# Altium PCB FAN_Boardv1_040116.PcbDoc
Units mil, origin at the board's own origin, x right, y up, seen from the top; angles counter-clockwise.
Board outline 3937.01 x 3937.01 mil, 2 copper layers (Top Layer, Bottom Layer); 104 components, 74 nets, 443 pads, 90 vias.
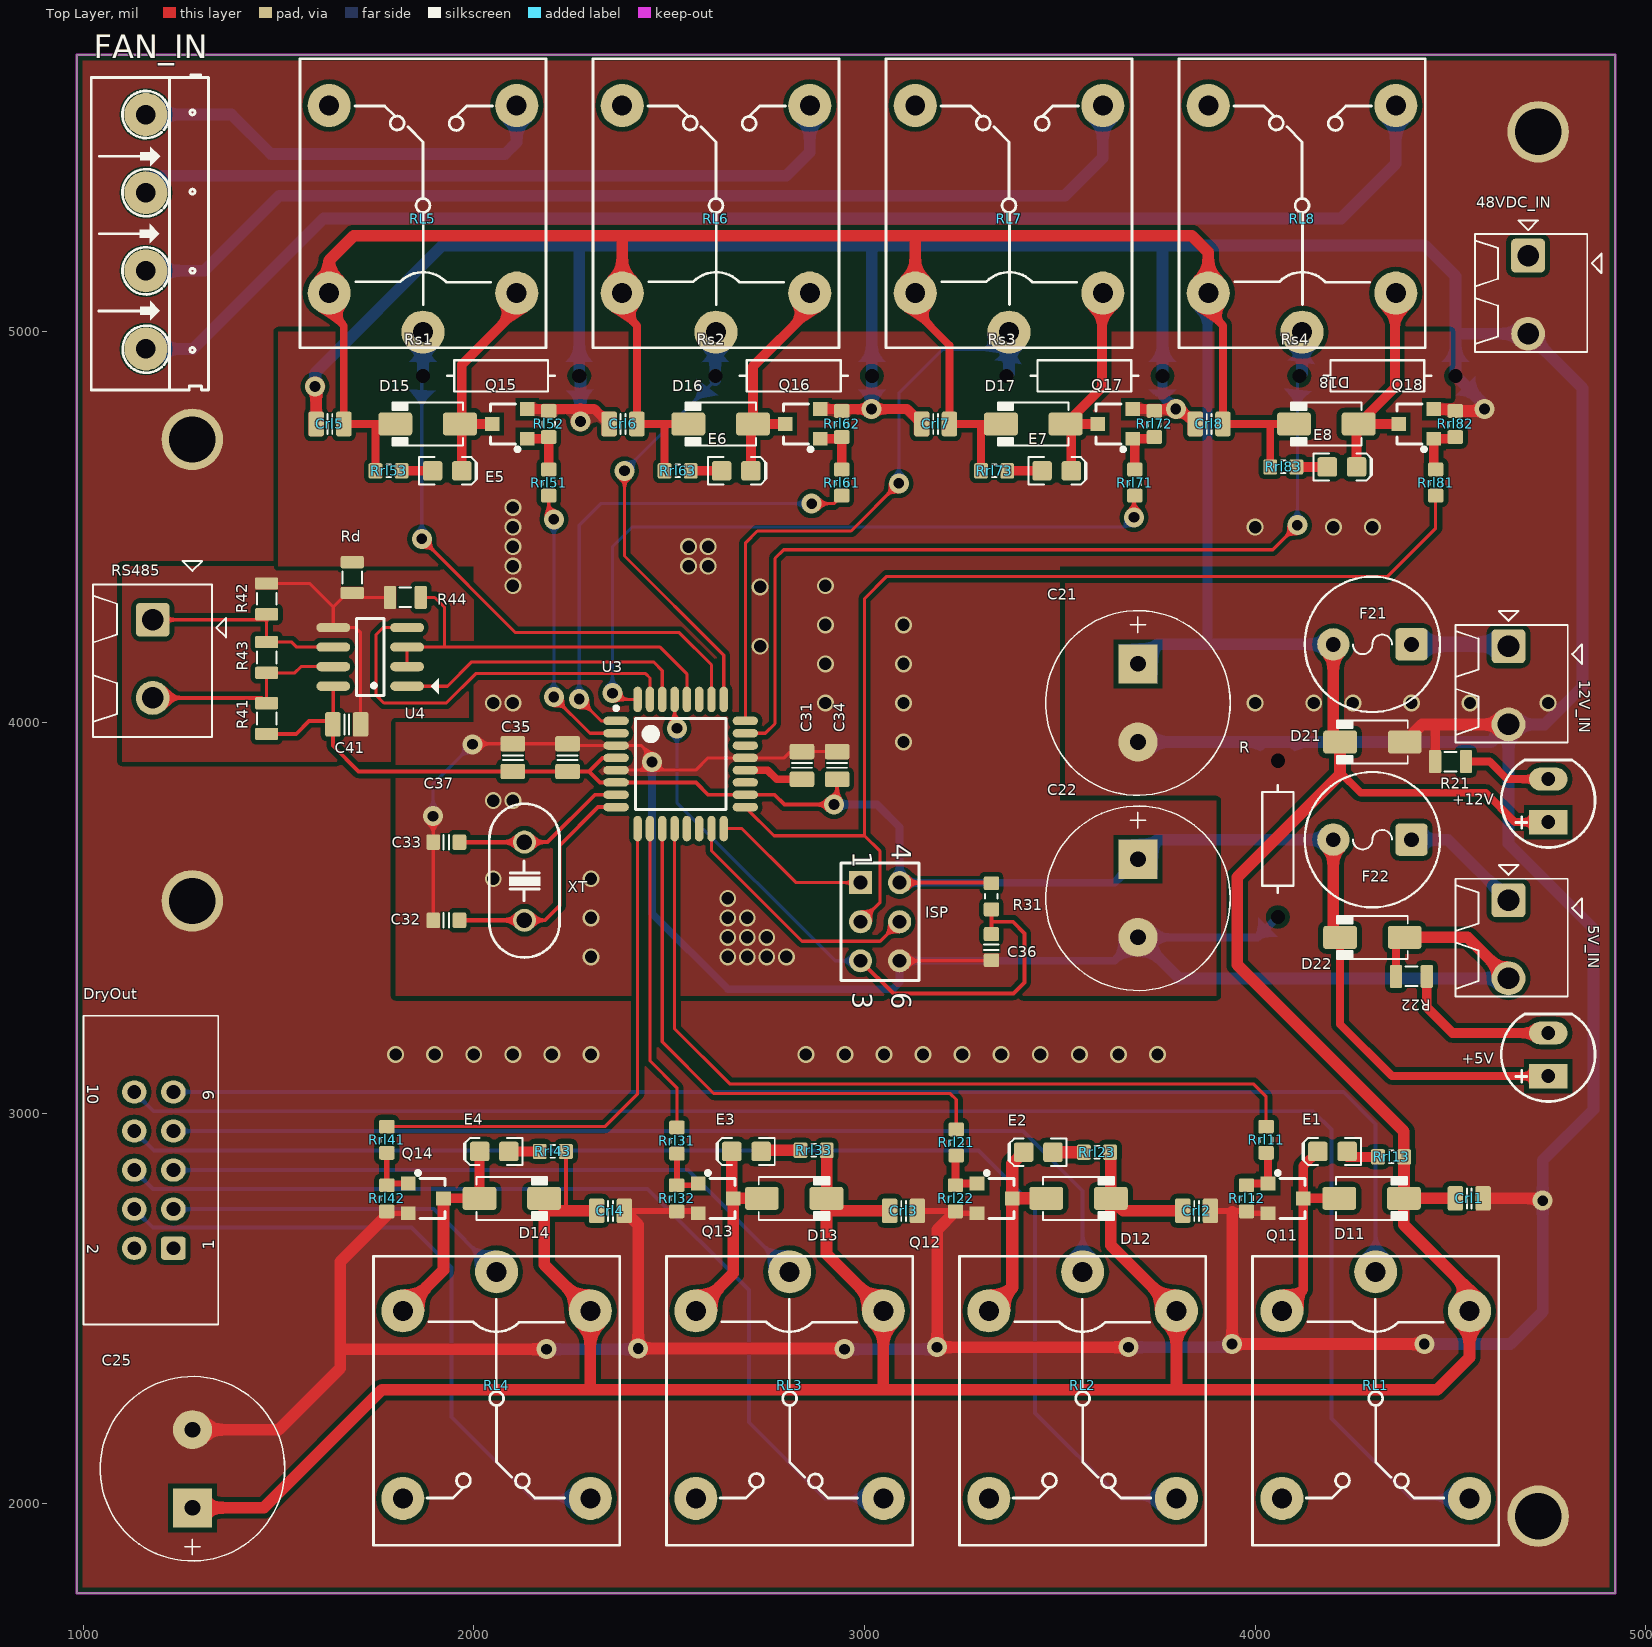
[diagram p0: Top Layer view]
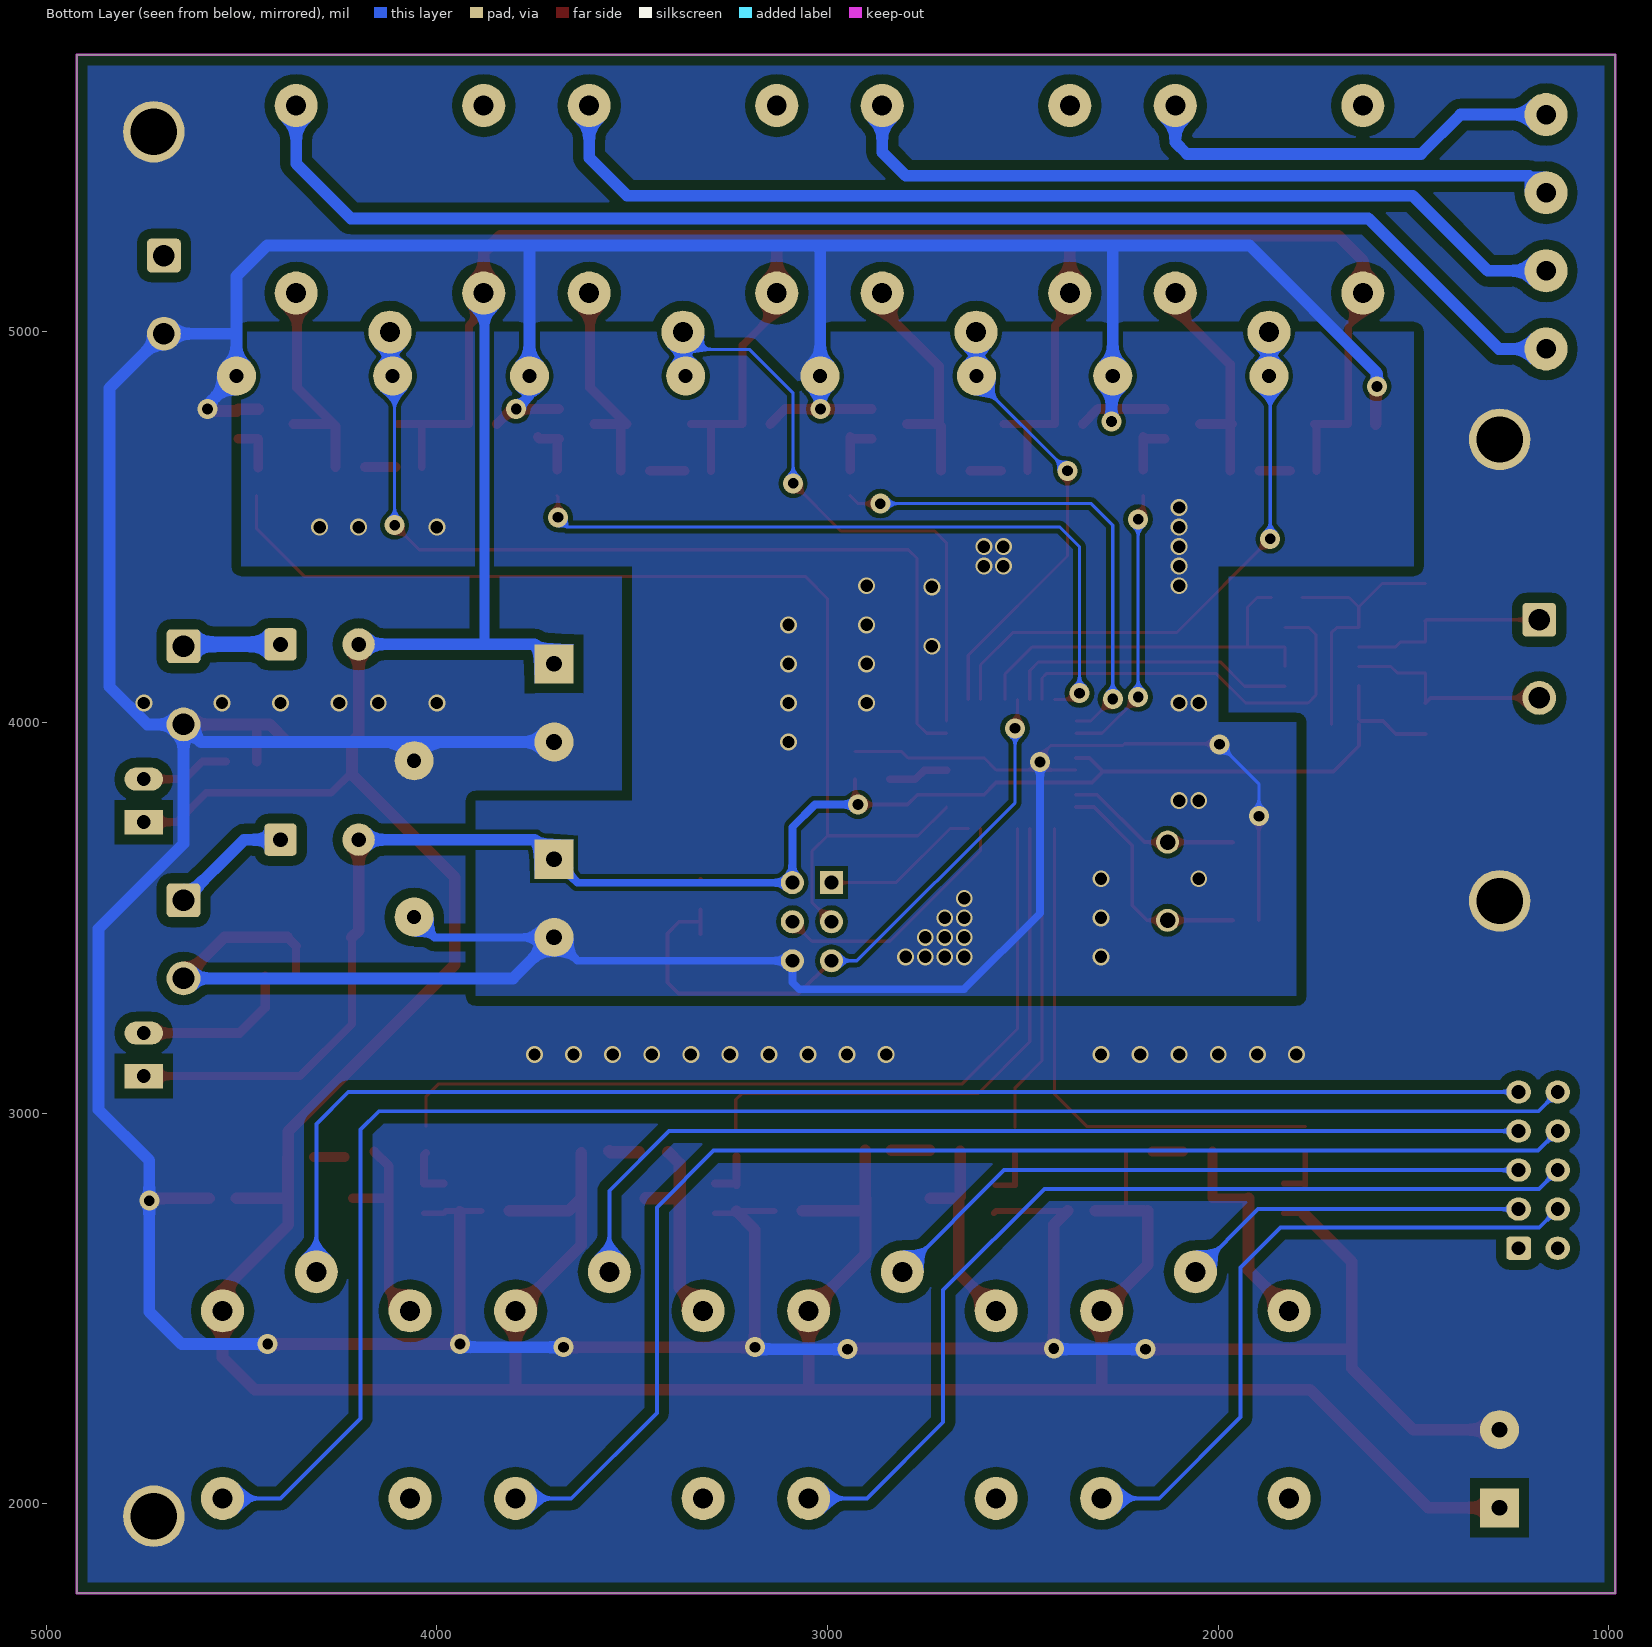
[diagram p1: Bottom Layer view, seen from below]
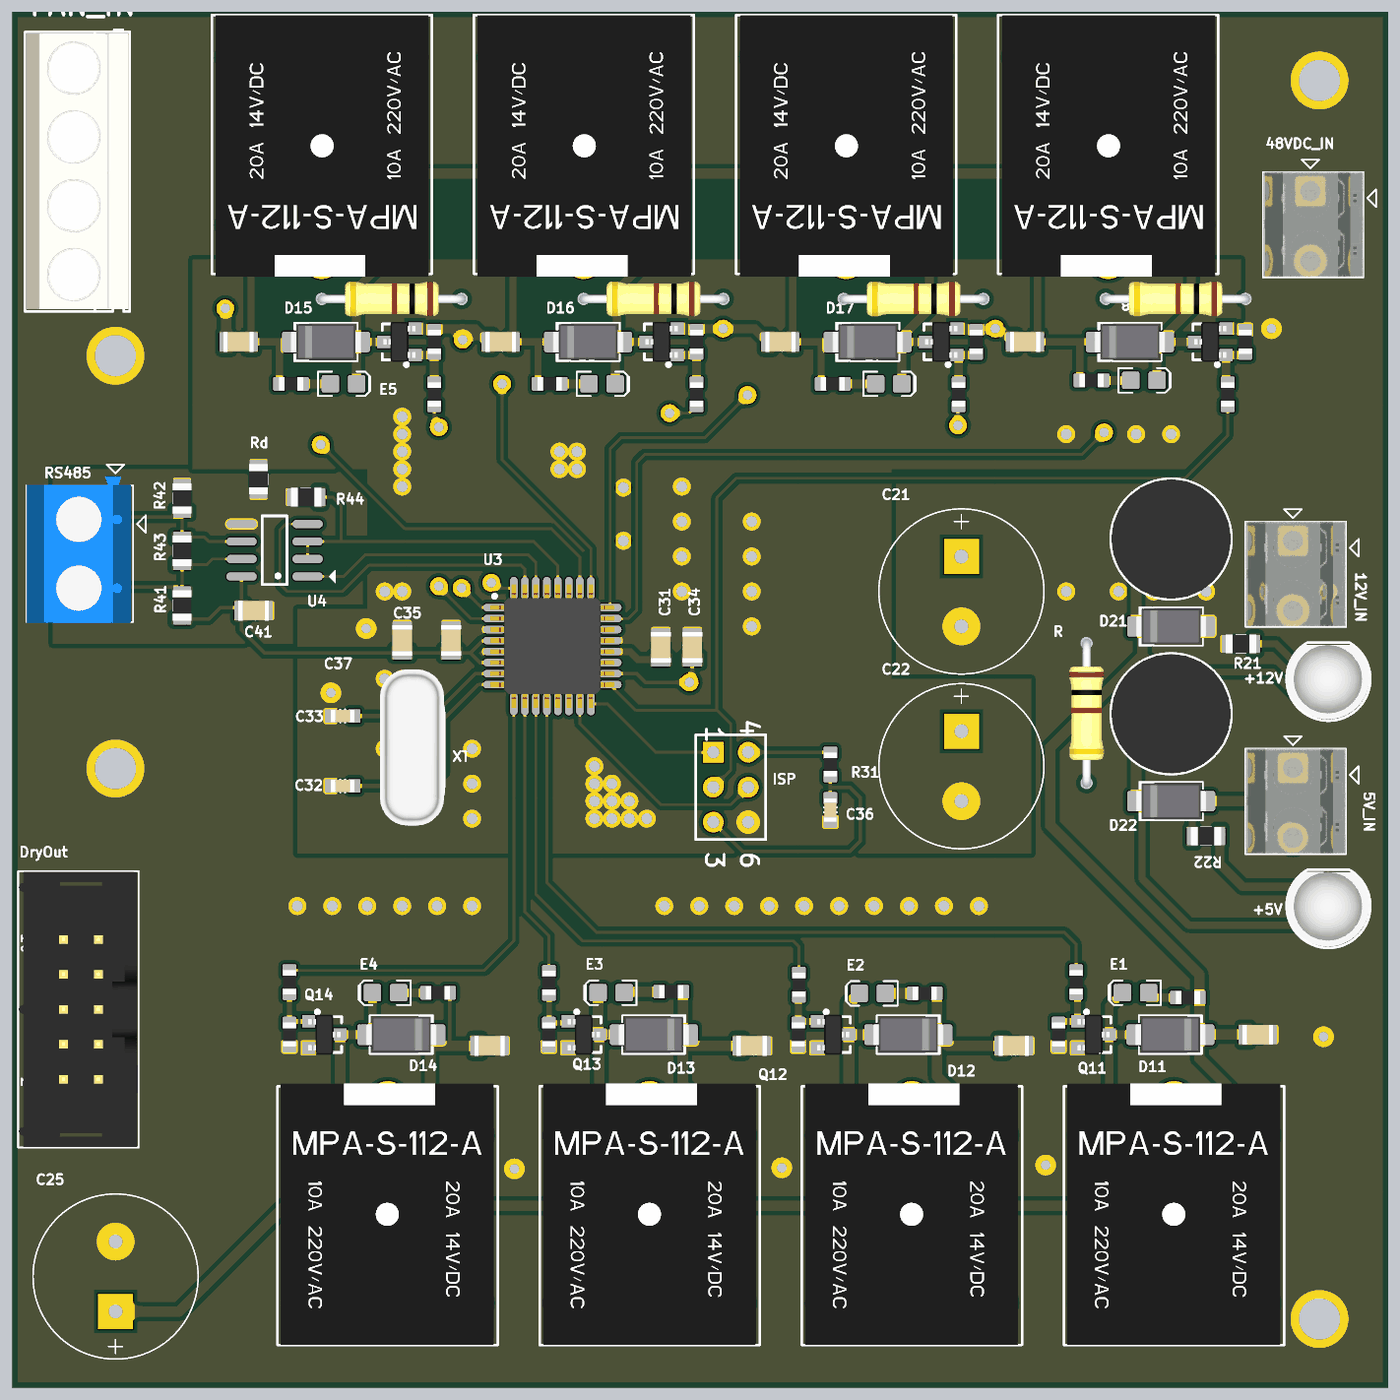
[diagram p2: 3D render of the assembled board from above, using the file's embedded part models]

## Layer stack, top to bottom
Top Solder: solder mask 0.4, Solder Resist, Dk 3.5
Top Layer: signal copper 1.4
Dielectric 1: dielectric 12.6, FR-4, Dk 4.8
Bottom Layer: signal copper 1.4
Bottom Solder: solder mask 0.4, Solder Resist, Dk 3.5

## Board outline
984.25,1771.65 4921.26,1771.65 4921.26,5708.66 984.25,5708.66

## Design rules (kind name [scope] priority, off if disabled: settings)
Clearance [All] p1: gap=12
PlaneConnect [All] p1: planeconnectstyle=Direct reliefexpansion=20 reliefentries=4 reliefconductorwidth=25 reliefairgap=10
PolygonConnect [All] p1: connectstyle=Direct reliefconductorwidth=25 reliefentries=4 polygonreliefangle="90 Angle" airgapwidth=10
RoutingVias [All] p1: holewidth=28 width=50 viastyle="Through Hole" minholewidth=23.62 minwidth=47.24 maxholewidth=196.85 maxwidth=196.85
SolderMaskExpansion [All] p1: expansion=4
Width [All] p1: maxlimit=118.11 minlimit=8 preferedwidth=10
29 further rules are at their usual default settings.

## Classes and differential pairs
component class FAN_Board_Control_v1_040116: 5V_IN 12V_IN 48VDC_IN +5V +12V C21 C22 C31 C32 C33 C34 C35 C36 C37 C41 D21 D22 F21 F22 ISP R R21 R22 R31 R41 R42 R43 R44 Rd RS485 U3 U4 XT
component class FAN_Boardv1_RelayAlarm_040116: C25 Crl1 Crl2 Crl3 Crl4 Crl5 Crl6 Crl7 Crl8 D11 D12 D13 D14 D15 D16 D17 D18 DryOut E1 E2 E3 E4 E5 E6 E7 E8 FAN_IN Q11 Q12 Q13 Q14 Q15 Q16 Q17 Q18 RL1 RL2 RL3 RL4 RL5 RL6 RL7 RL8 Rl52 Rrl11 Rrl12 Rrl13 Rrl21 Rrl22 Rrl23 Rrl31 Rrl32 Rrl33 Rrl41 Rrl42 Rrl43 Rrl51 Rrl53 Rrl61 Rrl62 Rrl63 Rrl71 Rrl72 Rrl73 Rrl81 Rrl82 Rrl83 Rs1 Rs2 Rs3 Rs4

## Components (designator, comment, footprint, x,y, rotation, side; value= is the part's Value field where it differs from the comment)
5V_IN "Stackable ScrewTerm" 2P_PCB_ScrewTerm_200mil 4800,3600 r180 top
12V_IN "Stackable ScrewTerm" 2P_PCB_ScrewTerm_200mil 4800,4250 r180 top
48VDC_IN "Stackable ScrewTerm" 2P_PCB_ScrewTerm_200mil 4850,5250 r180 top
+5V "Led" "LED 5mm RED" 4750,3150 r90 top
+12V "Led" "LED 5mm RED" 4750,3800 r90 top
C21 "2200uF/35V" CP_1000uF_25V 3700,4050 r270 top
C22 "2200uF/35V" CP_1000uF_25V 3700,3550 r270 top
C25 "2200uF/35V" CP_1000uF_25V 1280,2090 r90 top
C31 "Cap" CAPC2012N_F 2840,3890 r90 top
C32 "CAP NP" CAPC1608N 1929.72,3493.7 r180 top
C33 "CAP NP" CAPC1608N 1929.72,3693.7 r180 top
C34 "Cap" CAPC2012N_F 2930,3890 r90 top
C35 "Cap" CAPC2012N_F 2240,3910 r90 top
C36 "CAP NP" CAPC1608N 3325,3425 r90 top
C37 "Cap" CAPC2012N_F 2100,3910 r90 top
C41 "100nF/104" CAPC2012N_F 1675,3995 r180 top
Crl1 "CAP NP" CAPC2012N_F 4547.95,2782 r0 top
Crl2 "CAP NP" CAPC2012N_F 3850,2750 r0 top
Crl3 "CAP NP" CAPC2012N_F 3100,2750 r0 top
Crl4 "CAP NP" CAPC2012N_F 2350,2750 r0 top
Crl5 "CAP NP" CAPC2012N_F 1632,4764 r180 top
Crl6 "CAP NP" CAPC2012N_F 2382,4764 r180 top
Crl7 "CAP NP" CAPC2012N_F 3182,4764 r180 top
Crl8 "CAP NP" CAPC2012N_F 3882,4764 r180 top
D11 "Diode" DO-214AC 4297.95,2782 r0 top
D12 "Diode" DO-214AC 3547.95,2782 r0 top
D13 "Diode" DO-214AC 2820,2782 r0 top
D14 "Diode" DO-214AC 2097.45,2782 r0 top
D15 "Diode" DO-214AC 1882,4764 r180 top
D16 "Diode" DO-214AC 2632,4764 r180 top
D17 "Diode" DO-214AC 3432,4764 r180 top
D18 "Diode" DO-214AC 4182,4764 r180 top
D21 "Diode" DO-214AC 4300,3950 r180 top
D22 "Diode" DO-214AC 4300,3450 r180 top
DryOut "shrouded box header" 10P_PCB_HEADER_BRD_MNT 1181.1,2854.33 r180 top
E1 "Blue" LED-0805-A 4197.95,2902 r180 top
E2 "Blue" LED-0805-A 3445,2900 r180 top
E3 "Blue" LED-0805-A 2697.95,2902 r180 top
E4 "Blue" LED-0805-A 2052.45,2902 r180 top
E5 "Blue" LED-0805-A 1932,4644 r0 top
E6 "Blue" LED-0805-A 2672,4644 r0 top
E7 "Blue" LED-0805-A 3492,4644 r0 top
E8 "Blue" LED-0805-A 4222,4654 r0 top
F21 "1.5A" FUSE_SR-5-BK 4300,4200 r180 top
F22 "1.5A" FUSE_SR-5-BK 4300,3700 r180 top
FAN_IN "Header 4" HED4 1161,5556 r270 top
ISP "Header 3X2A" HDR2X3_CEN 2990,3590 r270 top
Q11 "C828" "SOT23 TOP" 4077.95,2782 r270 top
Q12 "C828" "SOT23 TOP" 3333.07,2782 r270 top
Q13 "C828" "SOT23 TOP" 2619.45,2782 r270 top
Q14 "C828" "SOT23 TOP" 1877.45,2782 r270 top
Q15 "C828" "SOT23 TOP" 2092,4764 r90 top
Q16 "C828" "SOT23 TOP" 2842,4764 r90 top
Q17 "C828" "SOT23 TOP" 3642,4764 r90 top
Q18 "C828" "SOT23 TOP" 4412,4764 r90 top
R "Res" RESTH_AXIAL-0.4 4058,3702 r270 top
R21 "Res_0805_1k" RESC2012N_F 4500,3900 r180 top
R22 "Res_0805_1k" RESC2012N_F 4400,3350 r180 top
R31 "Res" RESC1608N_ZERO 3325,3555 r90 top
R41 "1k" RESC2012N_F 1470,4010 r270 top
R42 "1k" RESC2012N_F 1470,4316.38 r270 top
R43 "330R" RESC2012N_F 1470,4166.38 r270 top
R44 "330R" RESC2012N_F 1825,4320 r0 top
Rd "Res" RESC2012N_F 1689,4371 r90 top
RL1 "Relay 10A/5V" RL_5PIN 3994.45,2635 r270 top
RL2 "Relay 10A/5V" RL_5PIN 3244.45,2635 r270 top
RL3 "Relay 10A/5V" RL_5PIN 2494.45,2635 r270 top
RL4 "Relay 10A/5V" RL_5PIN 1744.45,2635 r270 top
RL5 "Relay 10A/5V" RL_5PIN 2184,4958 r90 top
RL6 "Relay 10A/5V" RL_5PIN 2934,4958 r90 top
RL7 "Relay 10A/5V" RL_5PIN 3684,4958 r90 top
RL8 "Relay 10A/5V" RL_5PIN 4434,4958 r90 top
Rl52 "Res" RESC1608N_ZERO 2192,4764 r270 top
Rrl11 "Res" RESC1608N_ZERO 4027.95,2932 r270 top
Rrl12 "Res" RESC1608N_ZERO 3977.95,2782 r90 top
Rrl13 "Res" RESC1608N_ZERO 4347.95,2888.11 r0 top
Rrl21 "Res" RESC1608N_ZERO 3235,2925 r270 top
Rrl22 "Res" RESC1608N_ZERO 3233.07,2782 r90 top
Rrl23 "Res" RESC1608N_ZERO 3595,2900 r0 top
Rrl31 "Res" RESC1608N_ZERO 2520,2930 r270 top
Rrl32 "Res" RESC1608N_ZERO 2519.45,2782 r90 top
Rrl33 "Res" RESC1608N_ZERO 2870,2905 r0 top
Rrl41 "Res" RESC1608N_ZERO 1777.45,2932 r270 top
Rrl42 "Res" RESC1608N_ZERO 1777.45,2782 r90 top
Rrl43 "Res" RESC1608N_ZERO 2202.45,2902 r0 top
Rrl51 "Res" RESC1608N_ZERO 2192,4614 r90 top
Rrl53 "Res" RESC1608N_ZERO 1782,4644 r180 top
Rrl61 "Res" RESC1608N_ZERO 2942,4614 r90 top
Rrl62 "Res" RESC1608N_ZERO 2942,4764 r270 top
Rrl63 "Res" RESC1608N_ZERO 2522,4644 r180 top
Rrl71 "Res" RESC1608N_ZERO 3692,4614 r90 top
Rrl72 "Res" RESC1608N_ZERO 3742,4764 r270 top
Rrl73 "Res" RESC1608N_ZERO 3332,4644 r180 top
Rrl81 "Res" RESC1608N_ZERO 4462,4614 r90 top
Rrl82 "Res" RESC1608N_ZERO 4512,4764 r270 top
Rrl83 "Res" RESC1608N_ZERO 4072,4654 r180 top
Rs1 "Res" RESTH_AXIAL-0.4 2070,4887 r180 top
Rs2 "Res" RESTH_AXIAL-0.4 2819,4887 r180 top
Rs3 "Res" RESTH_AXIAL-0.4 3563,4887 r180 top
Rs4 "Res" RESTH_AXIAL-0.4 4313,4887 r180 top
RS485 "Stackable ScrewTerm" 2P_PCB1 1330,4317.87 r180 top
U3 "ATmega88PA" 32PIN 2529.72,3893.7 r0 top
U4 "MAX485" SO-8 1735,4167.87 r180 top
XT "20MHz" XT2 2129.72,3593.7 r270 top

## Footprints (in the part's own frame and the unit in brackets; to place one, negate y for a bottom-side part, rotate by r counter-clockwise, add the part's x,y. Pads: shape width x height; smd on the part's side, far side on the other; paste and mask are expansions set on the pad)
2P_PCB1 [mm]
  rrect25% 2.2x2.2 hole 1.4: 1(3.85,1.397)
  round 2.2 hole 1.4: 2(3.85,6.477)
  silkscreen extent -0.93,-2.41 7.75,9.02, body extent 0.14,-1.54 7.74,9.06, height 10.01
2P_PCB_ScrewTerm_200mil [mm]
  rrect25% 2.2x2.2 hole 1.4: 1(3.85,1.397)
  round 2.2 hole 1.4: 2(3.85,6.477)
  silkscreen extent -0.93,-0.89 7.3,7.66, body extent 0,0 7.3,7.62, height 8.5
10P_PCB_HEADER_BRD_MNT [mm] "HEADER BRD MNT 10POS 2.54MM"
  round 1.016 on Mech14: 0(0,0)
  rrect25% 1.6x1.5 hole 0.9: 1(-1.27,5.08)
  oval 1.6x1.5 hole 0.9: 2(1.27,5.08) 3(-1.27,2.54) 4(1.27,2.54) 5(-1.27,0) 6(1.27,0) 7(-1.27,-2.54) 8(1.27,-2.54) 9(-1.27,-5.08) 10(1.27,-5.08)
  silkscreen extent -4.19,-10.03 4.57,10.03, body extent -4.11,-10.01 4.52,10.01, height 9.91
32PIN [mm]
  oval 1.65x0.55 smd: 1(-4.2,2.8) 2(-4.2,2) 3(-4.2,1.2) 4(-4.2,0.4) 5(-4.2,-0.4) 6(-4.2,-1.2) 7(-4.2,-2) 8(-4.2,-2.8) 17(4.2,-2.8) 18(4.2,-2) 19(4.2,-1.2) 20(4.2,-0.4) 21(4.2,0.4) 22(4.2,1.2) 23(4.2,2) 24(4.2,2.8)
  oval 0.55x1.65 smd: 9(-2.8,-4.2) 10(-2,-4.2) 11(-1.2,-4.2) 12(-0.4,-4.2) 13(0.4,-4.2) 14(1.2,-4.2) 15(2,-4.2) 16(2.8,-4.2) 25(2.8,4.2) 26(2,4.2) 27(1.2,4.2) 28(0.4,4.2) 29(-0.4,4.2) 30(-1.2,4.2) 31(-2,4.2) 32(-2.8,4.2)
  silkscreen extent -4.32,-2.95 2.95,3.75, body extent -4.5,-4.5 4.5,4.5, height 1.6
CAPC1608N [mm] "Chip Capacitor, Body 1.6x0.8mm, 0603, IPC Medium Density"
  round 0.254 on Mech14: 0(0,0)
  rrect25% 0.9x1 smd: 1(-0.85,0) 2(0.85,0)
  Top Layer pour cut-out: -0.4,0.6 0.4,0.6 0.4,-0.6 -0.4,-0.6
  silkscreen extent -0.18,-0.48 0.18,0.48, body extent -0.85,-0.45 0.85,0.45, height 0.89
CAPC2012N_F [mm] "Chip Capacitor, Body 2.0x1.2mm, 0805, IPC Medium Density, for Flex circuits"
  round 0.254 on Mech14: 0(0,0)
  rrect25% 1.2x1.4 on Top Solder: 1(-0.9,0) 1(0.9,0)
  rrect25% 1x1.6 smd paste-1: 1(-0.9,0) 2(0.9,0)
  rrect25% 1x1.4 on Top Paste: 1(-0.9,0) 1(0.9,0)
  Top Layer pour cut-out: -0.4,0.8 0.4,0.8 0.4,-0.8 -0.4,-0.8
  silkscreen extent -0.15,-0.65 0.15,0.65, body extent -1.1,-0.72 1.1,0.73, height 1.34
CP_1000uF_25V [mil]
  rect 100x100 hole 40: 1(-100,0)
  round 100 hole 40: 2(100,0)
  silkscreen extent -236,-236 236,236, body extent -236,-236 237,236, height 791
DO-214AC [mm] "JEDEC DO214 variation AC. SMA"
  round 0.508 on Mech14: 0(0,0)
  rrect25% 2.2x1.5 smd: A(-2.1,0) K(2.1,0)
  silkscreen extent -2.3,-1.4 2.3,1.4, body extent -2.6,-1.3 2.6,1.3, height 2.42
FUSE_SR-5-BK [mm]
  round 0.5 on Mech14: 0(0,0)
  rrect25% 2.1x2.1 hole 0.965: 1(-2.54,0)
  round 2.1 hole 0.965: 2(2.54,0)
  silkscreen extent -4.4,-4.4 4.4,4.4, body extent -4.35,-4.32 4.35,4.32, height 8.29
HDR2X3_CEN [mm] "Connector; Header; 3x2 Position"
  rect 1.5x1.5 hole 0.9: 1(0,0)
  round 1.5 hole 0.9: 2(2.54,0) 3(5.08,0) 4(0,2.54) 5(2.54,2.54) 6(5.08,2.54)
  silkscreen extent -1.27,-1.27 6.35,3.81
HED4 [mil] "Header 4, 4 pin, hight 300mil, Pin to Pin 200, Colour Green"
  round 110 hole 50: 1(0,0) 2(200,0) 3(400,0) 4(600,0)
  silkscreen extent -101,-140 705,160, body extent -90,-138 698,157, height 394
"LED 5mm RED" [mm]
  rect 1.6x2.5 hole 0.9: A(-1.397,0)
  oval 1.5x2.5 hole 0.9: K(1.397,0)
  silkscreen extent -3.04,-3.05 2.64,3.04, body extent -2.94,-2.97 2.48,3.05, height 12.31
LED-0805-A [mil]
  round 20 on Mech14: 0(0,0)
  rrect25% 50x50 smd: A(-37.5,0) K(37.5,0)
  Top Layer pour cut-out: -15,30 15,30 15,-30 -15,-30
  silkscreen extent -72,-35 77,35, body extent -39,-25 39,25, height 31
RESC1608N_ZERO [mm] "Chip Resistor, Body 1.6x0.8mm, 0603, IPC Medium Density"
  round 0.254 on Mech14: 0(0,0)
  rrect25% 0.9x1 smd: 1(-0.85,0) 2(0.85,0)
  Top Layer pour cut-out: -0.4,0.6 0.4,0.6 0.4,-0.6 -0.4,-0.6
  silkscreen extent -0.15,-0.41 0.15,0.41, body extent -0.87,-0.47 0.88,0.48, height 0.54
RESC2012N_F [mm] "Chip Resistor, Body 2.0x1.2mm, 0805, IPC Medium Density"
  round 0.254 on Mech14: 0(0,0)
  rrect25% 1x1.3 on Top Solder: 1(-1,0) 1(1,0)
  rrect25% 0.8x1.5 smd paste-1: 1(-1,0) 2(1,0)
  rrect25% 0.8x1.3 on Top Paste: 1(-1,0) 1(1,0)
  Top Layer pour cut-out: -0.6,0.75 0.6,0.75 0.6,-0.75 -0.6,-0.75
  silkscreen extent -0.38,-0.64 0.38,0.64, body extent -1.1,-0.67 1.1,0.68, height 0.69
RESTH_AXIAL-0.4 [mil]
  round 0 / inner round 0 / far side round 100 hole 36 unplated: 1(-200,0) 2(200,0)
  silkscreen extent -138,-40 138,40, body extent -212,-50 212,50, height 102
RL_5PIN [mm]
  round 2.8 hole 1.3: 1(1.041,7.976) 2(15.773,14.072) 3(15.773,1.88) 4(3.581,1.88) 5(3.581,14.072)
  silkscreen extent 0.03,-0.03 18.82,15.98, body extent -0.18,0.2 18.82,15.7, height 15.5
SO-8 [mm] "8-Pin Small Outline Integrated Circuit 1.27 mm Pitch, IPC Medium Density"
  oval 2.2x0.6 smd: 1(-2.4,1.905) 2(-2.4,0.635) 3(-2.4,-0.635) 4(-2.4,-1.905) 5(2.4,-1.905) 6(2.4,-0.635) 7(2.4,0.635) 8(2.4,1.905)
  silkscreen extent -4.44,-2.5 0.9,2.5, body extent -1.95,-2.45 1.95,2.45, height 1.75
"SOT23 TOP" [mm]
  rect 0.9x0.95 smd: 1(-0.965,-1.143) 2(0,1.143) 3(0.965,-1.143)
  silkscreen extent -1.77,-0.63 1.3,1.25, body extent -1.46,-1.17 1.46,1.17, height 1
XT2 [mm]
  round 1.5 hole 1: 1(-2.54,0) 2(2.54,0)
  silkscreen extent -5.03,-2.29 4.96,2.29, body extent -5.93,-2.36 5.42,2.29, height 3.5

## Part data
5V_IN 12V_IN 48VDC_IN RS485: library part 2P_ScrewTerm_90S_3.81MM, "Terminal Block Screw Type THT 2-Position 3.81mm pitch"
C21 C22 C25: library part CP4, "Cap 1000uF/16V - 220uF/50V"
C41: library part "CAP NP"
DryOut: library part CONN_HEADER_2x5P_0.100in_Male, "Header THD 10 POS Double-row 2.54mm pitch"
E1 E2 E3 E4 E5 E6 E7 E8: library part LED_SMD_Blue_0805_100mcd, "LED 0805 SMD Blue 100mcd 470nm"
F21 F22: library part Fuse
FAN_IN: library part Hed4, "Header 4 (Green)"
ISP: "Header, 3-Pin, Dual row"
Q11 Q12 Q13 Q14 Q15 Q16 Q17 Q18: library part NPN, "Transistor C828 C1815...."
R21 R22: library part Res
R41 R42 R43 R44: library part Res, "Tro dan"
RL1 RL2 RL3 RL4 RL5 RL6 RL7 RL8: library part "Relay 1", "Relay SPDT,10A - 12VDC 5 Pin"
U3: library part ATmega48/168/328, "ATmega48/168/328"
U4: "RS232 - RS485 (Same sn75176)"
XT: library part Crystal

## Free pads (board coordinates)
  round 157.48 hole 118.11: 2(4724.41,5511.81) 3(4724.41,1968.5) 4(1279.53,4724.41) 5(1279.53,3543.31)

## Via types
v1: diameter 43.31, hole 31.5, Top Layer to Bottom Layer, 62 vias
v2: diameter 51.18, hole 27.56, Top Layer to Bottom Layer, 28 vias

## Nets (pads, with @x,y where several pads share a name; then routed paths per layer and width w, separated by ;. In a path a pad name is that pad's centre, name@x,y a point inside that pad or via, vN(x,y) a via of type N, cw(c..) or ccw(c..) an arc to the next point about the centre after c; other vN are vias at no path point)
+12V: +12V.A C21.1 C25.1 Crl1.1@4512.52,2782 Crl2.1@3814.57,2750 Crl3.1@3064.57,2750 Crl4.1@2314.57,2750 Crl5.1@1667.43,4764 Crl6.1@2417.43,4764 Crl7.1@3217.43,4764 Crl8.1@3917.43,4764 D11.K D12.K D13.K D14.K D15.K D16.K D17.K D18.K D21.K F21.2 RL1.5 RL2.5 RL3.5 RL4.5 RL5.5 RL6.5 RL7.5 RL8.5 Rrl13.2 Rrl23.2 Rrl33.2 Rrl43.2 Rrl53.2 Rrl63.2 Rrl73.2 Rrl83.2 | length 15337.3
  Top Layer w10: Rrl43.2 2235.91,2753.09 2239,2750
  Top Layer w20: RL5.5@1628,5055 1667.43,5015.57 1667.43,4764 1755,4764 1748.54,4757.54 Rrl53.2 ; RL6.5@2378,5055 2417.43,5015.57 2417.43,4764 D16.K ; Rrl63.2 2488.54,4757.54 ; RL7.5@3128,5055 3217.43,4965.57 3217.43,4764 3295,4764 ; Rrl73.2 3298.54,4760.46 3295,4764 ; D17.K 3295,4764 ; RL8.5@3878,5055 3917.43,5015.57 3917.43,4764 4035,4764 ; Rrl83.2 4038.54,4760.46 4035,4764 ; D18.K 4035,4764 ; 4217.32,3872.68 4270,3820 4590,3820 4665,3745 +12V.A
  Top Layer w30: C25.1 1463,1990 1765,2292 2305,2292 ; RL5.5 1630,5183 1693,5246 3838,5246 3880,5204 RL8.5 ; 2180.13,2750 2180.13,2612.32 RL4.5 2298.45,2298.55 2305,2292 ; 2190.13,2750 2239,2750 Crl4.1@2314.57,2750 ; RL6.5 2380,5245 ; D13.K 2902.68,2750 ; D13.K@2903.46,2782.79 Rrl33.2 ; Crl3.1@3064.57,2750 2902.68,2750 ; RL7.5 3130,5245 ; Rrl23.2@3630.63,2897.88 D12.K ; Crl2.1@3814.57,2750 3662.63,2750 D12.K ; F21.2 4200,3967.32 D21.K 4217.32,3872.68 4217.32,3867.32 3954,3604 3954,3380 4380.63,2953.37 D11.K ; D11.K@4381.42,2782.79 Rrl13.2 ; Crl1.1@4512.52,2782 D11.K ; 2305,2292 3048,2292 ; 2902.68,2750 2902.68,2639.77 RL3.5 3048.45,2292.45 3048,2292 ; 3048,2292 3800,2292 ; D12.K 3630.63,2661.82 RL2.5 3798.45,2293.55 3800,2292 ; 3800,2292 4466,2292 4548.45,2374.45 RL1.5 4548.45,2546.55 4380.63,2714.37 D11.K
  Bottom Layer w25: RL8.5@3878,5055 3878,4202 3880,4200
  Bottom Layer w30: C21.1 3750,4200 3880,4200 F21.2
+48V: 48VDC_IN.1
ADC0: RL8.1 Rs4.2 U3.23 | length 2378.2
  Top Layer w8: U3.23 2746.44,3972.44 2771,3997 2771,4420 2793,4442 4045,4442 v2(4108,4505)
  Bottom Layer w8: v2(4108,4505) Rs4.2@4108,4887
  Bottom Layer w30: Rs4.2 4120,4894 RL8.1
ADC1: RL7.1 Rs3.2 U3.24 | length 1583.7
  Top Layer w8: U3.24 2695.08,4459.08 2726,4490 2966,4490 v2(3088,4612)
  Bottom Layer w8: v2(3088,4612) 3088,4843 3200,4955 RL7.1@3368,4955
  Bottom Layer w30: Rs3.2 3370,4894 RL7.1
ADC2: RL6.1 Rs2.2 U3.25 | length 1097.2
  Top Layer w8: v2(2386,4644) 2386,4426 2639.96,4172.04 U3.25
  Bottom Layer w8: v2(2386,4644) Rs2.2@2618,4876
  Bottom Layer w30: Rs2.2@2618,4876 RL6.1@2618,4955
ADC3: RL5.1 Rs1.2 U3.26 | length 1492.5
  Top Layer w8: v2(1867,4470) 2107,4230 2526,4230 2608.46,4147.54 U3.26
  Bottom Layer w8: v2(1867,4470) Rs1.2@1867,4887
  Bottom Layer w30: Rs1.2 RL5.1
ADC4: U3.27
ADC6: U3.19
ADC7: U3.22
AREF: C31.1@2840,3854.57 U3.20 | length 154.6
  Top Layer w20: U3.20 2752.05,3877.95 2775.43,3854.57 C31.1@2840,3854.57
COM1: DryOut.9 RL1.1 | length 3489.8
  Bottom Layer w10: DryOut.9 4226.67,3054.33 4308.45,2972.55 RL1.1
COM2: DryOut.7 RL2.1 | length 2598.2
  Bottom Layer w10: DryOut.7 3405.67,2954.33 3558.45,2801.55 RL2.1
COM3: DryOut.5 RL3.1 | length 1685.2
  Bottom Layer w10: DryOut.5 2548.12,2854.33 RL3.1
COM4: DryOut.3 RL4.1 | length 893.8
  Bottom Layer w10: DryOut.3 1898.12,2754.33 RL4.1
COM5: DryOut.1
DGND: C41.1@1710.43,3995 R42.1@1470,4355.75 R44.1@1785.63,4320 Rd.1@1689,4331.63 U4.5 | length 713.4
  Top Layer w8: R42.1@1470,4355.75 1580.28,4355.75 1640.51,4295.51 ; C41.1@1710.43,3995 1710.43,4229.57 1697.13,4242.87 U4.5 1640.51,4295.51 ; R44.1@1785.63,4320 1665,4320 1640.51,4295.51
FAN1: Rrl51.1 U3.2 | length 718.6
  Top Layer w8: Rrl51.1 2192,4533 v2(2205,4520) ; v2(2205,4065) 2297.56,3972.44 U3.2
  Bottom Layer w8: v2(2205,4065) v2(2205,4520)
FAN2: Rrl61.1 U3.1 | length 1265.9
  Top Layer w8: v2(2270,4060) 2326.06,4003.94 U3.1 ; v2(2865,4560) 2921.46,4560 Rrl61.1
  Bottom Layer w8: v2(2270,4060) 2270,4505 2325,4560 v2(2865,4560)
FAN3: Rrl71.1 U3.32 | length 1868.5
  Top Layer w8: v2(2355,4075) 2370.94,4059.06 U3.32 ; v2(3690,4525) 3690,4578.54 Rrl71.1
  Bottom Layer w8: v2(2355,4075) 2355,4450 2405,4500 3665,4500 v2(3690,4525)
FAN4: ISP.2 Rrl81.1 U3.17 | length 2819.7
  Top Layer w8: U3.17 2768.54,3710 3000,3710 ; ISP.2 3040,3540 3040,3670 3000,3710 ; Rrl81.1 4462,4497 4339,4374 3057,4374 3000,4317 3000,3710
FAN_GND_1: FAN_IN.1 RL5.3 | length 1097.3
  Bottom Layer w30: FAN_IN.1 1380,5556 1481,5455 2080,5455 2110,5485 RL5.3
FAN_GND_2: FAN_IN.2 RL6.3 | length 1861.7
  Bottom Layer w30: FAN_IN.2 1204,5399 2800,5399 2860,5459 RL6.3
FAN_GND_3: FAN_IN.3 RL7.3 | length 2702.7
  Bottom Layer w30: FAN_IN.3 1310,5156 1502,5348 3513,5348 3610,5445 RL7.3
FAN_GND_4: FAN_IN.4 RL8.3 | length 3544.3
  Bottom Layer w30: FAN_IN.4 1282,4956 1616,5290 4220,5290 4360,5430 RL8.3
GND: 5V_IN.2 C22.2 C31.2 C32.2 C33.2 C34.2 C35.2 C36.1 C37.2 D22.A ISP.6 R22.2 R.2 Rd.2 U3.3 U3.5 U3.21 | length 5360.2
  Top Layer w8: v2(1896,3760) 1896.26,3759.74 C33.2 C32.2 ; v2(1997,3944) 1998.43,3945.43 C37.2 C35.2 2244.49,3940.95 U3.3 2429.05,3940.95 v2@2450,3920 ; U3.5 v2@2450,3877.95 ; v2@2456,3877.95 2567.95,3877.95 2599.45,3909.45 U3.21 2794.45,3909.45 2810.43,3925.43 C31.2 C34.2 ; ISP.6 3323.46,3390 C36.1
  Top Layer w20: R22.2 D22.A@4360.63,3427.95
  Top Layer w25: D22.A@4360.63,3427.95 D22.A
  Top Layer w30: D22.A 4543.43,3450 5V_IN.2
  Bottom Layer w8: v2(1896,3760) 1896,3843 v2(1997,3944)
  Bottom Layer w20: v2(2456,3899) 2456,3512 2651,3317 3072,3317 3090,3335 ISP.6 3640,3390 C22.2 4006,3450 R.2
  Bottom Layer w30: C22.2 3805,3345 5V_IN.2
  other v1: 2300,3400 2650,3400 2700,3400 2750,3400 2800,3400 2650,3450 2700,3450 2750,3450 2300,3500 2650,3500 2700,3500 2650,3550 2050,3600 2300,3600 2050,3800 2100,3800 3100,3950 2050,4050 2100,4050 2900,4050 3100,4050 2900,4150 3100,4150 2733,4195 2900,4250 3100,4250 2733,4347 2100,4350 2900,4350 2100,4400 2550,4400 2600,4400 2100,4450 2550,4450 2600,4450 2100,4500 4000,4500 4200,4500 4300,4500 2100,4550
MCU_RX: U3.30 U4.1 | length 761.5
  Top Layer w8: U4.1 1932.87,4092.87 1995,4155 2460,4155 2482.48,4132.52 U3.30
MCU_TX: U3.31 U4.4 | length 1041.7
  Top Layer w8: U4.4 1767.87,4242.87 1750,4225 1750,4070 1770,4050 1930,4050 2005,4125 2440,4125 2450.98,4114.02 U3.31
MISO: ISP.1 U3.16 | length 407.3
  Top Layer w8: U3.16 2686.65,3728.35 2825,3590 ISP.1
MOSI: ISP.5 U3.15 | length 655
  Top Layer w8: U3.15 2608.46,3671.54 2840,3440 3040,3440 ISP.5
Net5V_IN_1: 5V_IN.1 F22.1 | length 312.6
  Bottom Layer w30: F22.1 4493.43,3700 5V_IN.1
Net12V_IN_1: 12V_IN.1 F21.1 | length 250.5
  Bottom Layer w40: F21.1 4643.43,4200 12V_IN.1
Net+5V_2: +5V.K R22.1@4439.37,3350 | length 417.2
  Top Layer w25: R22.1@4439.37,3350 4439.37,3270.63 4505,3205 +5V.K
Net+12V_2: +12V.K R21.1@4539.37,3900 | length 229.3
  Top Layer w20: R21.1@4539.37,3900 4600,3900 4645,3855 +12V.K
NetD11_1: D11.A E1.K Q11.2 RL1.4 | length 538.4
  Top Layer w25: RL1.4 4122.95,2548.5 Q11.2 ; E1.K 4122.95,2864.5 Q11.2 ; D11.A Q11.2
NetD12_1: D12.A E2.K Q12.2 RL2.4 | length 530.1
  Top Layer w31.5: RL2.4 3378.07,2553.62 Q12.2 ; E2.K 3378.07,2870.57 Q12.2 ; D12.A Q12.2
NetD13_1: D13.A E3.K Q13.2 RL3.4 | length 516.6
  Top Layer w30: RL3.4 2664.45,2590 Q13.2 D13.A ; Q13.2@2660.45,2786 E3.K
NetD14_1: D14.A E4.K Q14.2 RL4.4 | length 543.5
  Top Layer w25: Q14.2 D14.A 2014.95,2782.18 E4.K
  Top Layer w30: RL4.4 1922.45,2598 Q14.2
NetD15_1: D15.A E5.K Q15.2 RL5.4 | length 550.7
  Top Layer w25: D15.A D15.A@1969.5,4764 ; E5.K D15.A@1969.5,4764 ; Q15.2 D15.A@1969.5,4764 ; RL5.4@2108,5055 1969.5,4916.5 D15.A@1969.5,4764
NetD16_1: D16.A E6.K Q16.2 RL6.4 | length 554.8
  Top Layer w25: E6.K 2709.5,4758.82 D16.A ; Q16.2 D16.A ; RL6.4@2858,5055 2714.68,4911.68 D16.A
NetD17_1: D17.A E7.K Q17.2 RL7.4 | length 533
  Top Layer w25: E7.K 3529.5,4761.5 D17.A@3532,4764 ; Q17.2 D17.A@3532,4764 ; RL7.4@3608,5055 3608,4857.32 D17.A D17.A@3532,4764
NetD18_1: D18.A E8.K Q18.2 RL8.4 | length 544.1
  Top Layer w25: E8.K 4259.5,4758.82 D18.A ; RL8.4@4358,5055 4358,4857.32 D18.A ; Q18.2 D18.A
NetE1_A: E1.A Rrl13.1 | length 79
  Top Layer w25: E1.A@4235.45,2888.11 Rrl13.1
NetE2_A: E2.A Rrl23.1 | length 77.3
  Top Layer w31.5: E2.A 3555.58,2900 Rrl23.1@3558.58,2903
NetE3_A: E3.A Rrl33.1 | length 98.1
  Top Layer w30: E3.A@2738.45,2905 Rrl33.1
NetE4_A: E4.A Rrl43.1 | length 79
  Top Layer w25: E4.A Rrl43.1
NetE5_A: E5.A Rrl53.1 | length 79
  Top Layer w25: Rrl53.1 E5.A
NetE6_A: E6.A Rrl63.1 | length 79
  Top Layer w25: Rrl63.1 E6.A
NetE7_A: E7.A Rrl73.1 | length 89
  Top Layer w25: Rrl73.1 E7.A
NetE8_A: E8.A Rrl83.1 | length 79
  Top Layer w25: Rrl83.1 E8.A
NetQ11_1: Q11.1 Rrl11.2 Rrl12.2 | length 131.1
  Top Layer w19.68: Rrl12.2@3982.49,2820 Q11.1 4032.95,2893.54 Rrl11.2
NetQ12_1: Q12.1 Rrl21.2 Rrl22.2 | length 124.6
  Top Layer w19.68: Rrl22.2 Rrl21.2@3233.07,2889.61 ; Rrl22.2@3237.61,2820 Q12.1
NetQ13_1: Q13.1 Rrl31.2 Rrl32.2 | length 131
  Top Layer w15: Rrl32.2 Q13.1@2569.91,2815.46 ; Rrl32.2@2520,2816.02 Rrl31.2
NetQ14_1: Q14.1 Rrl41.2 Rrl42.2 | length 139.9
  Top Layer w15: Rrl41.2 Rrl42.2 1781.98,2820 Q14.1
NetQ15_1: Q15.1 Rl52.2 Rrl51.2 | length 139.9
  Top Layer w25: Q15.1 2187.46,4726 Rl52.2 Rrl51.2
NetQ16_1: Q16.1 Rrl61.2 Rrl62.2 | length 139.9
  Top Layer w25: Q16.1 2937.46,4726 Rrl62.2 Rrl61.2
NetQ17_1: Q17.1 Rrl71.2 Rrl72.2 | length 137.5
  Top Layer w25: Rrl71.2 3692,4721 Q17.1 3737.46,4726 Rrl72.2
NetQ18_1: Q18.1 Rrl81.2 Rrl82.2 | length 124
  Top Layer w25: Rrl81.2@4457,4652.46 Q18.1 Rrl82.2@4507.46,4726
NO1: DryOut.10 RL1.2 | length 4281.2
  Bottom Layer w10: DryOut.10 1180.43,3005 4148,3005 4195,2958 4195,2219 4400,2014 RL1.2
NO2: DryOut.8 RL2.2 | length 3365
  Bottom Layer w10: DryOut.8 1181.43,2904 3292,2904 3437,2759 3437,2233 3656,2014 RL2.2
NO3: DryOut.6 RL3.2 | length 2463.4
  Bottom Layer w10: DryOut.6 1179.43,2806 2445,2806 2704,2547 2704,2209 2899,2014 RL3.2
NO4: DryOut.4 RL4.2 | length 1698.4
  Bottom Layer w10: DryOut.4 1178.43,2707 1841,2707 1943,2605 1943,2222 2151,2014 RL4.2
NO5: DryOut.2
PC5: R44.2 U3.28 U4.2 U4.3 | length 1032.9
  Top Layer w8: U4.2 U4.3 1925,4192.87 ; R44.2 1900,4320 1925,4295 1925,4192.87 ; U3.28 2545.47,4124.53 2477.13,4192.87 1925,4192.87
PGND: 12V_IN.2 48VDC_IN.2 C21.2 C25.2 Crl1.2 Crl2.2 Crl3.2 Crl4.2 Crl5.2 Crl6.2 Crl7.2 Crl8.2 D21.A pad.2 pad.3 pad.4 pad.5 Q11.3 Q12.3 Q13.3 Q14.3 Q15.3 Q16.3 Q17.3 Q18.3 R21.2 R.1 Rl52.1 Rrl12.1 Rrl22.1 Rrl32.1 Rrl42.1 Rrl62.1 Rrl72.1 Rrl82.1 Rs1.1 Rs2.1 Rs3.1 Rs4.1 | length 15855.4
  Top Layer w15: Rrl42.1@1781.98,2744 Q14.3 ; Crl4.2 2568.45,2750 Q13.3 ; Crl3.2 Rrl22.1@3231.61,2750 ; Rrl22.1@3237.61,2744 Q12.3 ; Crl2.2 Rrl12.1@3976.49,2750 ; Rrl12.1 3982.49,2744 Q11.3
  Top Layer w25: Q15.3 2308.57,4802 Crl6.2 ; Q16.3 v2(3018,4802) 3108.57,4802 Crl7.2 ; Q17.3 v2(3797,4802) 3808.57,4802 Crl8.2 ; R21.2 4460.63,3990.63
  Top Layer w30: C25.2 1501,2190 1658,2347 1658,2396 ; v2(1594,4860) 1596.57,4857.43 Crl5.2 ; Rrl42.1@1781.98,2744 1658,2620.02 1658,2396 ; v2(2186,2396) 1658,2396 ; v2(2273,4770) 2273,4801 ; Crl4.2 2421,2714.43 v2(2421,2398) 2947,2398 v2(2949,2396) ; Rrl22.1 3186,2701.46 v2(3186,2401) v2(3676,2401) ; 3941,2748 v2(3941,2409) v2(4433,2409) ; D21.A 4427.68,3995 4465,3995 ; Q18.3 Rrl82.1@4507.46,4802 ; 4460.63,3990.63 4465,3995 ; Rrl82.1 4582.46,4797.46 v2(4587,4802) ; Crl1.2 v2@4730,2782 ; 12V_IN.2 4465,3995
  Bottom Layer w25: Rs3.1 3763,4836 v2(3797,4802)
  Bottom Layer w30: v2(1594,4860) 1594,4895 1920,5221 2266,5221 ; v2(2186,2396) 2419,2396 v2(2421,2398) ; v2(2273,4770) 2273,4884 Rs1.1 2270,5217 2266,5221 ; v2(2949,2396) 3181,2396 v2(3186,2401) ; v2(3018,4802) 3019,4803 Rs2.1 3019,5210 3023,5214 ; v2(3676,2401) 3933,2401 v2(3941,2409) ; C21.2 4603.43,3950 12V_IN.2 ; Rs3.1 3763,5212 ; v2(4433,2409) 4653,2409 4736,2492 v2(4736,2776) 4736,2879 4866,3009 4866,3472 4648.43,3689.57 12V_IN.2 ; v2(4587,4802) 4587,4813 Rs4.1 4513,4991 ; 2266,5221 4434,5221 4513,5142 4513,4991 ; 4513,4991 4517,4995 48VDC_IN.2 4838,4855.43 4838,4092 4741,3995 12V_IN.2
  other v1: 1800,3150 1900,3150 2000,3150 2100,3150 2200,3150 2300,3150 2850,3150 2950,3150 3050,3150 3150,3150 3250,3150 3350,3150 3450,3150 3550,3150 3650,3150 3750,3150 4000,4050 4150,4050 4250,4050 4400,4050 4550,4050 4750,4050
RELAY_1: Rrl11.1 U3.12 | length 2174.9
  Top Layer w8: U3.12 2513.98,3216.02 2655,3075 3995,3075 4027.95,3042.05 Rrl11.1
RELAY_2: Rrl21.1 U3.11 | length 1436
  Top Layer w8: U3.11 2482.48,3182.52 2615,3050 3220,3050 3235,3035 Rrl21.1
RELAY_3: Rrl31.1 U3.10 | length 793.5
  Top Layer w8: U3.10 2450.98,3134.02 2520,3065 Rrl31.1
RELAY_4: Rrl41.1 U3.9 | length 1355.7
  Top Layer w8: Rrl41.1 2335.46,2965.46 2419.49,3049.49 U3.9
RS485A: R42.2 R43.1@1470,4205.75 RS485.1 U4.6 | length 522.9
  Top Layer w8: 1470,4260 1470,4205.75 1534.25,4205.75 1547.13,4192.87 U4.6
  Top Layer w10: RS485.1 1467.12,4262.88 1470,4260
RS485B: R41.1@1470,4049.37 R43.2 RS485.2 U4.7 | length 551.9
  Top Layer w8: R41.1@1470,4049.37 R43.2 1542.01,4127.01 1557.87,4142.87 U4.7
  Top Layer w10: RS485.2 1456.49,4062.88 R41.1@1470,4049.37
RST: C36.2 ISP.3 R31.1 U3.29 | length 1656.6
  Top Layer w8: U3.29 2513.98,3991.02 v2(2520,3985)
  Top Layer w10: ISP.3 3074,3306 3381,3306 3410,3335 3410,3460 3380,3490 3325,3490 ; C36.2 3325,3490 ; R31.1 3325,3490
  Bottom Layer w8: v2(2520,3985) 2520,3795 2925,3390 ISP.3
VCC: +5V.A C22.1 C34.1@2930,3854.57 C35.1@2240,3874.57 C37.1@2100,3874.57 C41.2 D22.K F22.2 ISP.4 R31.2 R41.2 U3.4 U3.6 U3.18 U4.8 | length 4584.3
  Top Layer w10: R41.2 1545.63,3970.63 1578.31,4003.31 C41.2@1635,4003.31 ; C41.2 1639.57,3940.43 1705.43,3874.57 2240,3874.57 2294.57,3874.57 ; C41.2@1640.51,4008.82 U4.8 ; U3.4 2329.45,3909.45 2294.57,3874.57 ; v2@2915,3790 2795,3790 2770.04,3814.96 U3.18 2600.04,3814.96 2568.54,3846.46 U3.6 2322.68,3846.46 2294.57,3874.57 ; v2@2930,3805 C34.1@2930,3854.57 ; ISP.4 3315.79,3590 R31.2@3325,3599.21
  Top Layer w20: D22.K 4217.32,3227.68 4350,3095 +5V.A
  Top Layer w30: F22.2 4200,3467.32 D22.K
  Bottom Layer w20: v2(2922,3790) 3032,3790 3090,3732 ISP.4 3640,3590 C22.1
  Bottom Layer w30: C22.1 3750,3700 F22.2
XTAL1: C33.1 U3.7 XT.1 | length 451.4
  Top Layer w10: XT.1 2188.7,3693.7 2309.96,3814.96 U3.7
  Top Layer w12: C33.1 XT.1
XTAL2: C32.1 U3.8 XT.2 | length 611.2
  Top Layer w10: XT.2 2182.4,3493.7 2220,3531.3 2220,3685 2318.46,3783.46 U3.8
  Top Layer w12: C32.1 XT.2
pads on no net: C31.0 C31.1@2840,3854.57 C31.1@2840,3925.43 C31.1@2840.01,3854.56 C31.1@2840.01,3925.43 C32.0 C33.0 C34.0 C34.1@2930,3854.57 C34.1@2930,3925.43 C34.1@2930.01,3854.56 C34.1@2930.01,3925.43 C35.0 C35.1@2240,3874.57 C35.1@2240,3945.43 C35.1@2240.01,3874.56 C35.1@2240.01,3945.43 C36.0 C37.0 C37.1@2100,3874.57 C37.1@2100,3945.43 C37.1@2100.01,3874.56 C37.1@2100.01,3945.43 C41.0 C41.1@1639.57,3995 C41.1@1639.57,3995.01 C41.1@1710.43,3995 C41.1@1710.44,3995.01 Crl1.0 Crl1.1@4512.52,2781.99 Crl1.1@4512.52,2782 Crl1.1@4583.38,2781.99 Crl1.1@4583.39,2782 Crl2.0 Crl2.1@3814.56,2749.99 Crl2.1@3814.57,2750 Crl2.1@3885.43,2749.99 Crl2.1@3885.43,2750 Crl3.0 Crl3.1@3064.56,2749.99 Crl3.1@3064.57,2750 Crl3.1@3135.43,2749.99 Crl3.1@3135.43,2750 Crl4.0 Crl4.1@2314.56,2749.99 Crl4.1@2314.57,2750 Crl4.1@2385.43,2749.99 Crl4.1@2385.43,2750 Crl5.0 Crl5.1@1596.57,4764 Crl5.1@1596.57,4764.01 Crl5.1@1667.43,4764 Crl5.1@1667.44,4764.01 Crl6.0 Crl6.1@2346.57,4764 Crl6.1@2346.57,4764.01 Crl6.1@2417.43,4764 Crl6.1@2417.44,4764.01 Crl7.0 Crl7.1@3146.57,4764 Crl7.1@3146.57,4764.01 Crl7.1@3217.43,4764 Crl7.1@3217.44,4764.01 Crl8.0 Crl8.1@3846.57,4764 Crl8.1@3846.57,4764.01 Crl8.1@3917.43,4764 Crl8.1@3917.44,4764.01 D11.0 D12.0 D13.0 D14.0 D15.0 D16.0 D17.0 D18.0 D21.0 D22.0 DryOut.0 E1.0 E2.0 E3.0 E4.0 E5.0 E6.0 E7.0 E8.0 F21.0 F22.0 R21.0 R21.1@4460.63,3900 R21.1@4460.63,3900.01 R21.1@4539.37,3900 R21.1@4539.37,3900.01 R22.0 R22.1@4360.63,3350 R22.1@4360.63,3350.01 R22.1@4439.37,3350 R22.1@4439.37,3350.01 R31.0 R41.0 R41.1@1469.99,3970.63 R41.1@1469.99,4049.37 R41.1@1470,3970.63 R41.1@1470,4049.37 R42.0 R42.1@1469.99,4277.01 R42.1@1469.99,4355.75 R42.1@1470,4277.01 R42.1@1470,4355.75 R43.0 R43.1@1469.99,4127.01 R43.1@1469.99,4205.75 R43.1@1470,4127.01 R43.1@1470,4205.75 R44.0 R44.1@1785.63,4319.99 R44.1@1785.63,4320 R44.1@1864.37,4319.99 R44.1@1864.37,4320 Rd.0 Rd.1@1689,4331.63 Rd.1@1689,4410.37 Rd.1@1689.01,4331.63 Rd.1@1689.01,4410.37 RL1.3 RL2.3 RL3.3 RL4.3 RL5.2 RL6.2 RL7.2 RL8.2 Rl52.0 Rrl11.0 Rrl12.0 Rrl13.0 Rrl21.0 Rrl22.0 Rrl23.0 Rrl31.0 Rrl32.0 Rrl33.0 Rrl41.0 Rrl42.0 Rrl43.0 Rrl51.0 Rrl53.0 Rrl61.0 Rrl62.0 Rrl63.0 Rrl71.0 Rrl72.0 Rrl73.0 Rrl81.0 Rrl82.0 Rrl83.0 U3.13 U3.14

## Polygon pours and split planes (outlines as drawn)
GND on Bottom Layer "GND_L02_P000" (solid, remove dead copper, pour order 0): 1500,5000 4500,5000 4500,4400 3500,4400 3500,3800 3900,3800 3900,3300 1800,3300 1800,4000 2000,4000 2000,4400 1500,4400
PGND on Bottom Layer "PGND_L02_P008" (solid, remove dead copper, pour order 8): 984.25,1771.65 4921.26,1771.65 4921.26,5708.66 984.25,5708.66
GND on Top Layer "GND_L01_P002" (solid, remove dead copper, pour order 2): 1500,4400 2000,4400 2000,4000 1800,4000 1800,3300 3900,3300 3900,3800 3500,3800 3500,4400 4500,4400 4500,5000 1500,5000
DGND on Top Layer "DGND_L01_P004" (solid, remove dead copper, pour order 4): 1100,4400 2000,4400 2000,3900 1100,3900
PGND on Top Layer "PGND_L01_P010" (solid, remove dead copper, pour order 10): 984.25,1771.65 4921.26,1771.65 4921.26,5708.66 984.25,5708.66

## Keep-outs
Keep-Out Layer:
  the board outline again, w5.91

## Text inside footprints (layer, text, board x,y; h text height)
DryOut: Top Overlay "2" at 1011.1,2664.33 h30 r270; Top Overlay "1" at 1336.1,2650.76 h30 r90; Top Overlay "10" at 1011.1,3074.61 h30 r270; Top Overlay "9" at 1336.1,3033.34 h30 r90
ISP: Top Overlay "6" at 3070,3310 h50 r270; Top Overlay "3" at 2970,3310 h50 r270; Top Overlay "1" at 2970,3670 h50 r270; Top Overlay "4" at 3070,3690 h50 r270